# Altium PCB XILINX_JTAG_PCB.PcbDoc
Units mm, origin at the board's own origin, x right, y up, seen from the top; angles counter-clockwise.
Board outline 50 x 40 mm, 2 copper layers (L1 (Top), L2 (Bottom)); 26 components, 26 nets, 78 pads, 20 vias.
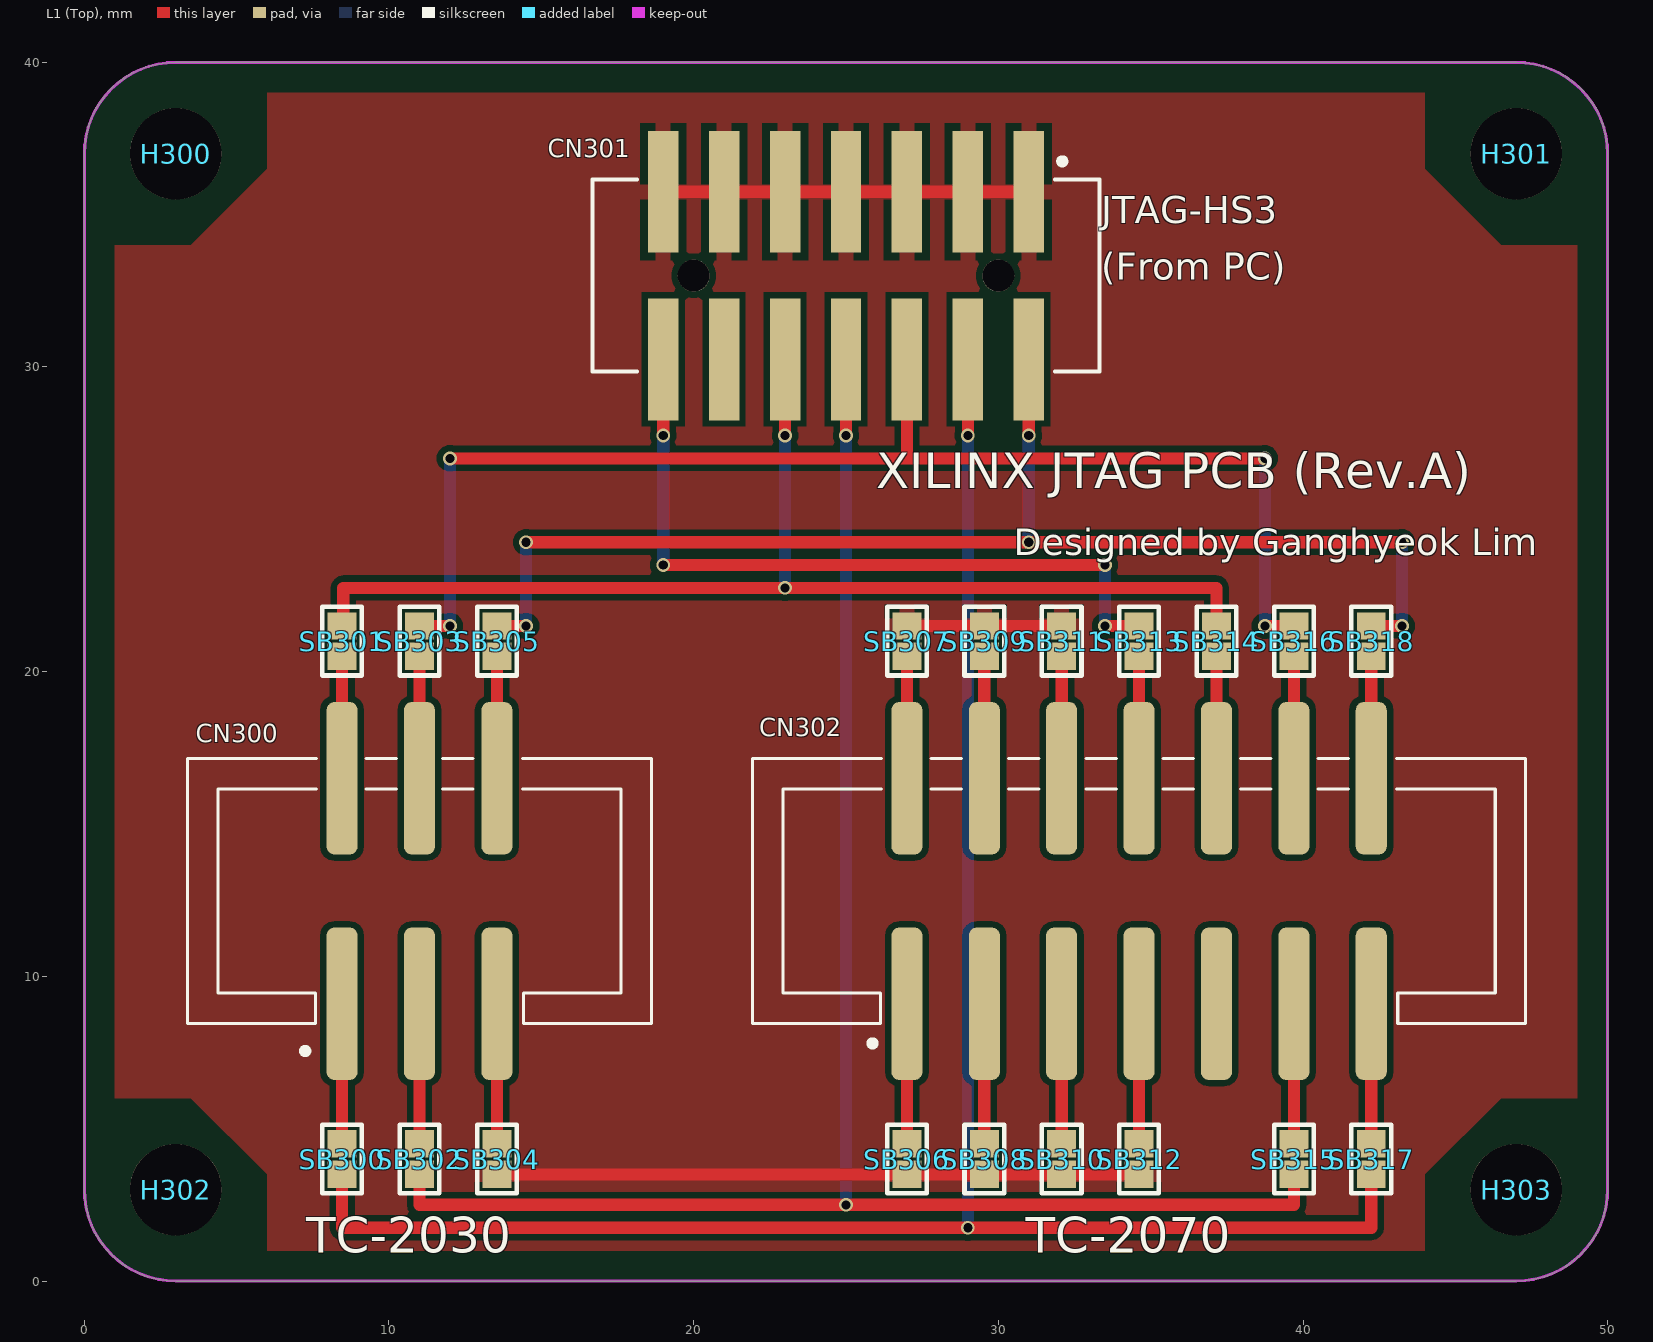
[diagram p0: L1 (Top) view]
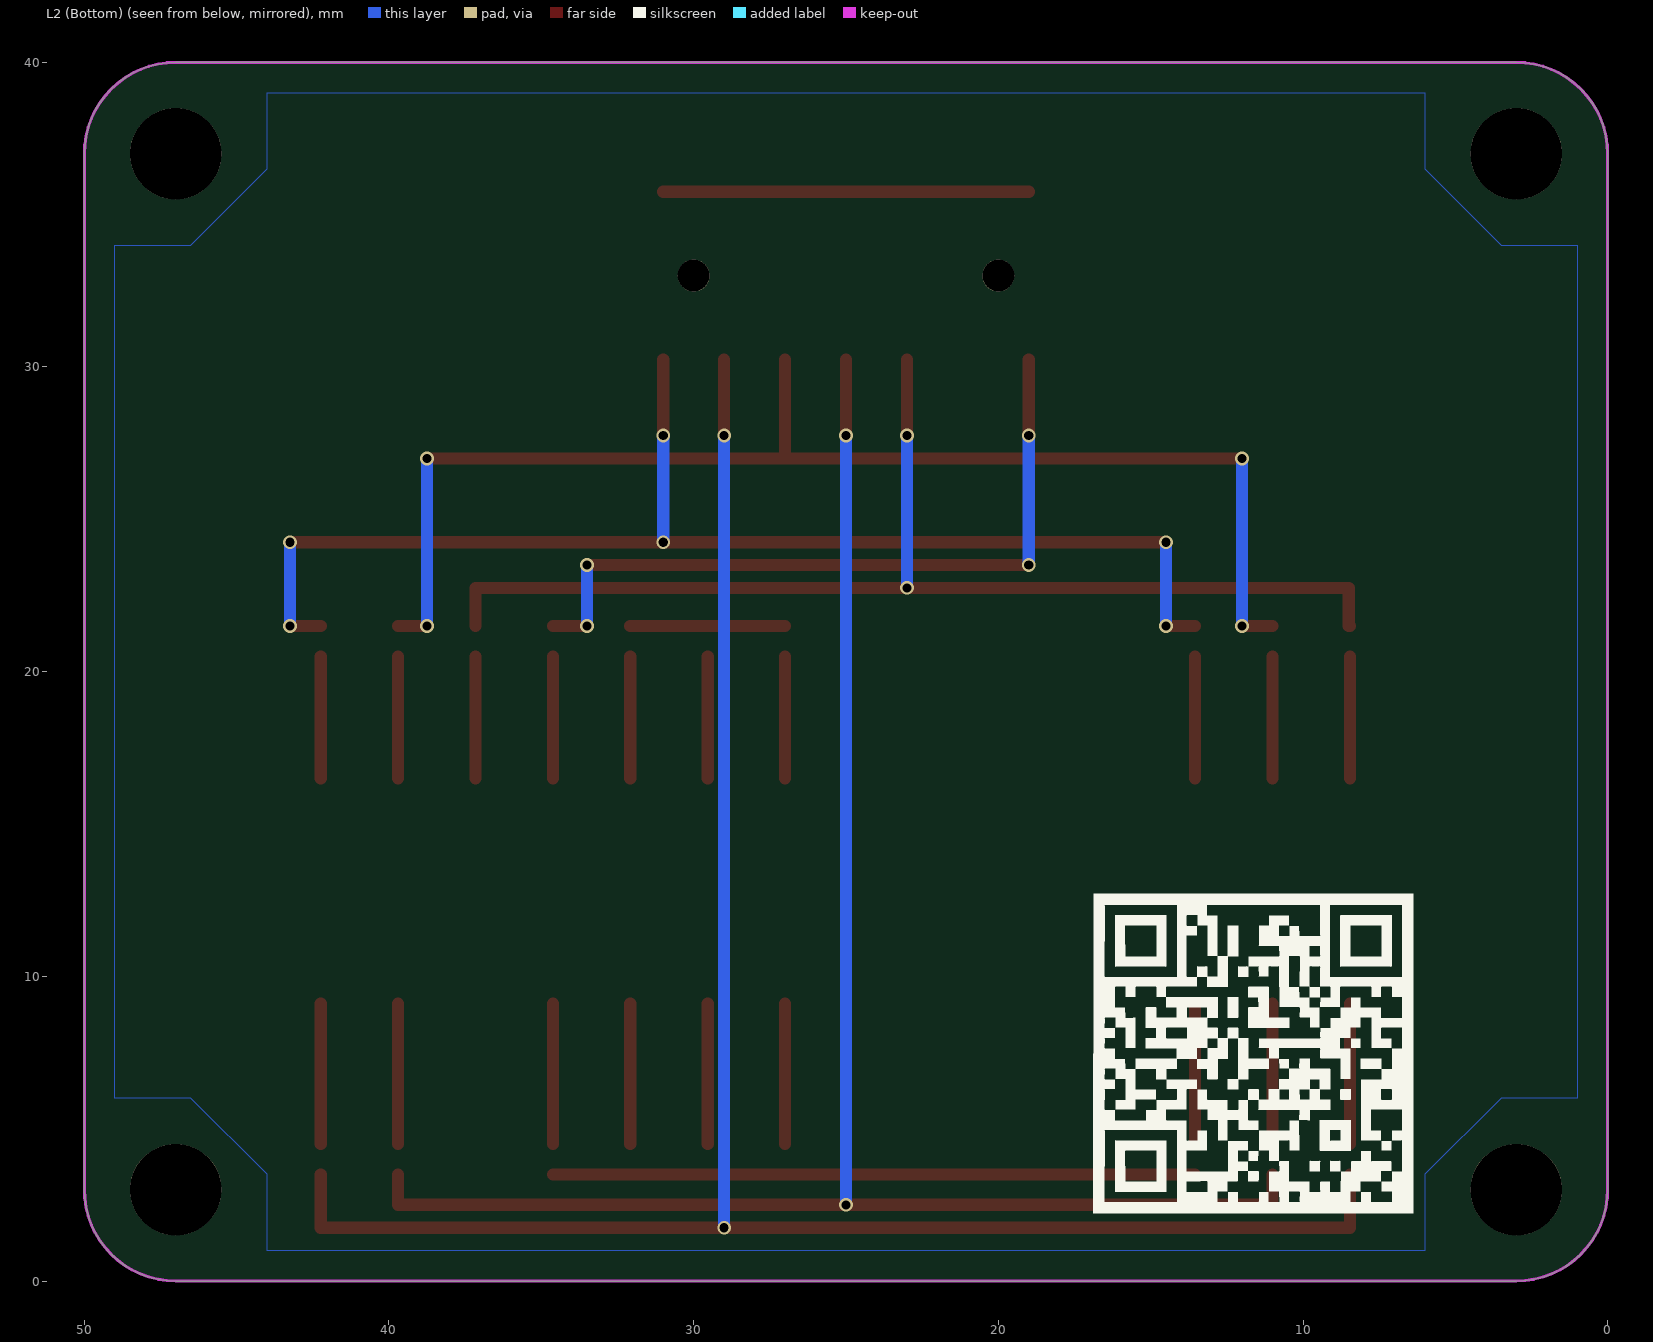
[diagram p1: L2 (Bottom) view, seen from below]

## Layer stack, top to bottom
Top Solder: solder mask 0.0102, Solder Resist, Dk 3.5
L1 (Top): signal copper 0.0356
Dielectric 1: dielectric 0.32, FR-4, Dk 4.8
L2 (Bottom): signal copper 0.0356
Bottom Solder: solder mask 0.0102, Solder Resist, Dk 3.5

## Board outline
3,0 cw(c3,3) 0,3 0,37 cw(c3,37) 3,40 47,40 cw(c47,37) 50,37 50,3 cw(c47,3) 47,0

## Design rules (kind name [scope] priority, off if disabled: settings)
BoardOutlineClearance [All] p1: gap=0.2 ignorepadtopadclearanceinfootprint=FALSE except(0.4: Arc-SplitBarrior Arc-SplitContinuation Track-SplitBarrior Track-SplitContinuation SMDPad-SplitBarrior SMDPad-SplitContinuation THPad-SplitBarrior THPad-SplitContinuation Via-SplitBarrior Via-SplitContinuation Fill-SplitBarrior Fill-SplitContinuation Poly-SplitBarrior Poly-SplitContinuation Region-SplitBarrior Region-SplitContinuation Text-SplitBarrior Text-SplitContinuation)
Clearance "Clearance Bottom Layer" [OnLayer('Bottom Layer')] p1: gap=0.203 ignorepadtopadclearanceinfootprint=TRUE except(0.254: Arc-Text Track-Text SMDPad-Text THPad-Text Via-Text Fill-Text Poly-Text Region-Text Text-Text)
Clearance "Clearance Top Layer" [OnLayer('Top Layer')] p2: gap=0.203 ignorepadtopadclearanceinfootprint=TRUE except(0.254: Arc-Text Track-Text SMDPad-Text THPad-Text Via-Text Fill-Text Poly-Text Region-Text Text-Text)
Clearance [All] p3: gap=0.2 ignorepadtopadclearanceinfootprint=FALSE except(0.089: Arc-Arc Arc-Track Arc-SMDPad Track-Track Track-SMDPad SMDPad-SMDPad; 0.127: Arc-Via Track-Via SMDPad-Via THPad-Via Via-Via; 0.254: Arc-Text Track-Text SMDPad-Text THPad-Text Via-Text Fill-Text Poly-Text Region-Text Text-Text)
HoleSize [All] p1: absolutevalues=TRUE maxlimit=6.3 minlimit=0.2 maxpercent=80.000 minpercent=20.000
MinimumAnnularRing [All] p1: minimumring=0.076
MinimumSolderMaskSliver [All] p1: minsoldermaskwidth=0.1
PolygonConnect PolygonConnect_1 [All] p1: thpad.connectstyle=Relief thpad.reliefconductorwidth=0.508 thpad.reliefentries=4 thpad.polygonreliefangle="90 Angle" thpad.airgapwidth=0.254 smdpad.connectstyle=Relief smdpad.reliefconductorwidth=0.508 smdpad.reliefentries=4 smdpad.polygonreliefangle="90 Angle" smdpad.airgapwidth=0.254 via.connectstyle=Direct via.reliefconductorwidth=0.508 via.reliefentries=4 via.polygonreliefangle="90 Angle" via.airgapwidth=0.254
RoutingCorners [All] p1: cornerstyle=Round minsetback=2.54 maxsetback=2.54
RoutingVias [All] p1: holewidth=0.3 width=0.45 viastyle="Through Hole" minholewidth=0.15 minwidth=0.3 maxholewidth=1 maxwidth=2
SilkToSilkClearance [All] p1: silktosilkclearance=0.1
SilkToSolderMaskClearance [IsPad] p1: minsilkscreentomaskgap=0.1 clearancetoexposedcopper=TRUE
SolderMaskExpansion [All] p1: expansion=0.102 istentingtop=FALSE
Width [All] p1: maxlimit=2 minlimit=0.1 preferedwidth=0.2
25 further rules are at their usual default settings.

## Components (designator, comment, footprint, x,y, rotation, side; value= is the part's Value field where it differs from the comment)
CN300 "3FB-06P-SMD" CON_BOX_HEADER_DUAL_2x3PIN(2.54MM) 11,12.8 r0 top
CN301 "0878321420" "CON_BOX_HEADER_DUAL_2x7PIN(2.00MM) (0878321420)" 25,33 r180 top
CN302 "3020-14-0300-00" "CON_BOX_HEADER_DUAL_2x7PIN(2.54MM) (3020-14-0300-00)" 34.62,12.8 r0 top
H300 "NTH-3MM" HOLE_NTH-3.0MM 3,37 r90 top
H301 "NTH-3MM" HOLE_NTH-3.0MM 47,37 r0 top
H302 "NTH-3MM" HOLE_NTH-3.0MM 3,3 r90 top
H303 "NTH-3MM" HOLE_NTH-3.0MM 47,3 r90 top
SB300 "SB" "SB_Solder-Bridge (Narrow)" 8.46,4 r90 top
SB301 "SB" "SB_Solder-Bridge (Narrow)" 8.46,21 r90 top
SB302 "SB" "SB_Solder-Bridge (Narrow)" 11,4 r90 top
SB303 "SB" "SB_Solder-Bridge (Narrow)" 11,21 r90 top
SB304 "SB" "SB_Solder-Bridge (Narrow)" 13.54,4 r90 top
SB305 "SB" "SB_Solder-Bridge (Narrow)" 13.54,21 r90 top
SB306 "SB" "SB_Solder-Bridge (Narrow)" 27,4 r90 top
SB307 "SB" "SB_Solder-Bridge (Narrow)" 27,21 r90 top
SB308 "SB" "SB_Solder-Bridge (Narrow)" 29.54,4 r90 top
SB309 "SB" "SB_Solder-Bridge (Narrow)" 29.54,21 r90 top
SB310 "SB" "SB_Solder-Bridge (Narrow)" 32.08,4 r90 top
SB311 "SB" "SB_Solder-Bridge (Narrow)" 32.08,21 r90 top
SB312 "SB" "SB_Solder-Bridge (Narrow)" 34.62,4 r90 top
SB313 "SB" "SB_Solder-Bridge (Narrow)" 34.62,21 r90 top
SB314 "SB" "SB_Solder-Bridge (Narrow)" 37.16,21 r90 top
SB315 "SB" "SB_Solder-Bridge (Narrow)" 39.7,4 r90 top
SB316 "SB" "SB_Solder-Bridge (Narrow)" 39.7,21 r90 top
SB317 "SB" "SB_Solder-Bridge (Narrow)" 42.24,4 r90 top
SB318 "SB" "SB_Solder-Bridge (Narrow)" 42.24,21 r90 top

## Footprints (in the part's own frame and the unit in brackets; to place one, negate y for a bottom-side part, rotate by r counter-clockwise, add the part's x,y. Pads: shape width x height; smd on the part's side, far side on the other; paste and mask are expansions set on the pad)
CON_BOX_HEADER_DUAL_2x3PIN(2.54MM) [mm]
  rrect50% 1.02x5 smd mask+0: 1(-2.54,-3.7) 2(-2.54,3.7) 3(0,-3.7) 4(0,3.7) 5(2.54,-3.7) 6(2.54,3.7)
  silkscreen extent -7.61,-5.3 7.61,4.35, body extent -7.62,-4.75 7.62,4.75, height 10.52
"CON_BOX_HEADER_DUAL_2x7PIN(2.00MM) (0878321420)" [mm] "Molex 0878321420"
  rect 1x4 smd: 1(-6,-2.75) 2(-6,2.75) 3(-4,-2.75) 4(-4,2.75) 5(-2,-2.75) 6(-2,2.75) 7(0,-2.75) 8(0,2.75) 9(2,-2.75) 10(2,2.75) 11(4,-2.75) 12(4,2.75) 13(6,-2.75) 14(6,2.75)
  round 1.05 hole 1.05 unplated: ""(-5,0) ""(5,0)
  silkscreen extent -8.32,-3.85 8.32,3.15, body extent -8.33,-3.15 8.33,3.15, height 7.61
"CON_BOX_HEADER_DUAL_2x7PIN(2.54MM) (3020-14-0300-00)" [mm] "3020-14-0300-00-TR"
  rrect50% 1.02x5 smd mask+0: 1(-7.62,-3.7) 2(-7.62,3.7) 3(-5.08,-3.7) 4(-5.08,3.7) 5(-2.54,-3.7) 6(-2.54,3.7) 7(0,-3.7) 8(0,3.7) 9(2.54,-3.7) 10(2.54,3.7) 11(5.08,-3.7) 12(5.08,3.7) 13(7.62,-3.7) 14(7.62,3.7)
  silkscreen extent -12.69,-5.05 12.69,4.35, body extent -12.7,-5.59 12.7,5.59, height 11.44
HOLE_NTH-3.0MM [mm]
  round 3 hole 3: 1(0,0)
"SB_Solder-Bridge (Narrow)" [mm] "SB (Solder-Bridge)"
  rect 0.9x0.95 smd mask+0.038: 1(-0.5,0) 2(0.5,0)
  silkscreen extent -1.12,-0.65 1.12,0.65

## Part data
CN300: library part CON_BOX_HEADER_DUAL_2x3PIN(2.54MM), "BOX HEADER 2x3 Pin SMD / 2.54mm pitch / with IDC Connector"
CN301: library part CON_BOX_HEADER_DUAL_2x7PIN(2.00MM), "CONN HEADER SMD 14POS 2MM"
CN302: library part CON_BOX_HEADER_DUAL_2x7PIN(2.54MM), "BOX HEADER 2x7 Pin SMD / 2.54mm pitch / with IDC Connector"
H300 H301 H302 H303: library part HOLE_NTH-3.0MM, "Non-Through Hole 3mm"
SB300 SB301 SB302 SB303 SB304 SB305 SB306 SB307 SB308 SB309 SB310 SB311 SB312 SB313 SB314 SB315 SB316 SB317 SB318: library part "SB_Solder-Bridge (Narrow)", "SB_Solder-Bridge"

## Via types
v1: diameter 0.45, hole 0.3, L1 (Top) to L2 (Bottom), tented both sides, 20 vias

## Nets (pads, with @x,y where several pads share a name; then routed paths per layer and width w, separated by ;. In a path a pad name is that pad's centre, name@x,y a point inside that pad or via, vN(x,y) a via of type N, cw(c..) or ccw(c..) an arc to the next point about the centre after c; other vN are vias at no path point)
DGND: CN301.1 CN301.3 CN301.5 CN301.7 CN301.9 CN301.11 CN301.13 SB304.1 SB306.1 SB307.2 SB308.1 SB309.2 SB310.1 SB311.2 SB312.1 | length 38.2
  L1 (Top) w0.4: SB304.1 SB306.1 SB308.1 SB310.1 SB312.1 ; CN301.13 CN301.11 CN301.9 CN301.7 CN301.5 CN301.3 CN301.1 ; SB307.2 SB309.2 SB311.2
JTAG_TCK: CN301.6 SB303.2 SB316.2 | length 43
  L1 (Top) w0.4: SB303.2 v1(12,21.5) ; v1(12,27) 27,27 ; CN301.6 27,27 ; v1(38.75,21.5) SB316.2 ; v1(38.75,27) 27,27
  L2 (Bottom) w0.4: v1(12,21.5) v1(12,27) ; v1(38.75,21.5) v1(38.75,27)
JTAG_TDI: CN301.10 SB301.2 SB314.2 | length 38.7
  L1 (Top) w0.4: SB301.2 8.5,21.5 8.5,22.75 v1(23,22.75) 37.16,22.75 SB314.2 ; v1(23,27.75) CN301.10
  L2 (Bottom) w0.4: v1(23,22.75) v1(23,27.75)
JTAG_TDO: CN301.8 SB302.1 SB315.1 | length 58.5
  L1 (Top) w0.4: SB302.1 11,2.5 v1(25,2.5) 39.7,2.5 SB315.1 ; v1(25,27.75) CN301.8
  L2 (Bottom) w0.4: v1(25,2.5) v1(25,27.75)
JTAG_TMS: CN301.4 SB300.1 SB317.1 | length 65.8
  L1 (Top) w0.4: SB300.1 8.46,1.75 v1(29,1.75) 42.24,1.75 ; v1(29,27.75) CN301.4 ; SB317.1 42.24,1.75 ; 42.25,1.75 42.24,1.75
  L2 (Bottom) w0.4: v1(29,1.75) v1(29,27.75)
NetCN300_1: CN300.1 SB300.2 | length 4.9
  L1 (Top) w0.4: SB300.2@8.46,4.75 SB300.2 CN300.1
NetCN300_2: CN300.2 SB301.1 | length 4.3
  L1 (Top) w0.4: CN300.2 SB301.1 SB301.1@8.46,20.25
NetCN300_3: CN300.3 SB302.2 | length 4.9
  L1 (Top) w0.4: SB302.2@11,4.75 SB302.2 CN300.3
NetCN300_4: CN300.4 SB303.1 | length 4.3
  L1 (Top) w0.4: CN300.4 SB303.1 SB303.1@11,20.25
NetCN300_5: CN300.5 SB304.2 | length 4.9
  L1 (Top) w0.4: SB304.2@13.54,4.75 SB304.2 CN300.5
NetCN300_6: CN300.6 SB305.1 | length 4.3
  L1 (Top) w0.4: CN300.6 SB305.1 SB305.1@13.54,20.25
NetCN302_1: CN302.1 SB306.2 | length 4.6
  L1 (Top) w0.4: SB306.2 27,4.75 CN302.1
NetCN302_2: CN302.2 SB307.1 | length 4
  L1 (Top) w0.4: CN302.2 27,20.25 SB307.1
NetCN302_3: CN302.3 SB308.2 | length 4.6
  L1 (Top) w0.4: SB308.2 29.54,4.75 CN302.3
NetCN302_4: CN302.4 SB309.1 | length 4
  L1 (Top) w0.4: CN302.4 29.54,20.25 SB309.1
NetCN302_5: CN302.5 SB310.2 | length 4.6
  L1 (Top) w0.4: SB310.2 32.08,4.75 CN302.5
NetCN302_6: CN302.6 SB311.1 | length 4
  L1 (Top) w0.4: CN302.6 32.08,20.25 SB311.1
NetCN302_7: CN302.7 SB312.2 | length 4.6
  L1 (Top) w0.4: SB312.2 34.62,4.75 CN302.7
NetCN302_8: CN302.8 SB313.1 | length 4
  L1 (Top) w0.4: CN302.8 34.62,20.25 SB313.1
NetCN302_10: CN302.10 SB314.1 | length 4
  L1 (Top) w0.4: CN302.10 37.16,20.25 SB314.1
NetCN302_11: CN302.11 SB315.2 | length 4.6
  L1 (Top) w0.4: SB315.2 39.7,4.75 CN302.11
NetCN302_12: CN302.12 SB316.1 | length 4
  L1 (Top) w0.4: CN302.12 39.7,20.25 SB316.1
NetCN302_13: CN302.13 SB317.2 | length 4.6
  L1 (Top) w0.4: SB317.2 42.24,4.75 CN302.13
NetCN302_14: CN302.14 SB318.1 | length 4
  L1 (Top) w0.4: CN302.14 42.24,20.25 SB318.1
P3.3VS: CN301.2 SB305.2 SB318.2 | length 42.2
  L1 (Top) w0.4: SB305.2 v1(14.5,21.5) ; v1(14.5,24.25) v1(31,24.25) v1(43.25,24.25) ; v1(31,27.75) CN301.2 ; SB318.2 v1(43.25,21.5)
  L2 (Bottom) w0.4: v1(14.5,21.5) v1(14.5,24.25) ; v1(31,24.25) v1(31,27.75) ; v1(43.25,21.5) v1(43.25,24.25)
PS_NRST: CN301.14 SB313.2 | length 24.4
  L1 (Top) w0.4: v1(19,23.5) v1(33.5,23.5) ; v1(19,27.75) CN301.14 ; v1(33.5,21.5) SB313.2
  L2 (Bottom) w0.4: v1(19,23.5) v1(19,27.75) ; v1(33.5,21.5) v1(33.5,23.5)
pads on no net: CN301. CN301.12 CN302.9 H300.1 H301.1 H302.1 H303.1

## Polygon pours and split planes (outlines as drawn)
DGND on L1 (Top) "DGND_L1 (Top)" (solid, remove dead copper, pour order 0): 3.5,6 6,3.5 6,1 44,1 44,3.5 46.5,6 49,6 49,34 46.5,34 44,36.5 44,39 6,39 6,36.5 3.5,34 1,34 1,6
DGND on L2 (Bottom) "DGND_L2 (Bottom)" (solid, remove dead copper, pour order 1): 3.5,6 6,3.5 6,1 44,1 44,3.5 46.5,6 49,6 49,34 46.5,34 44,36.5 44,39 6,39 6,36.5 3.5,34 1,34 1,6

## Keep-outs
Keep-Out Layer:
  the board outline again, w0.1

## Silkscreen, mask and mechanical layers (free items; w line width, h text height)
Top Overlay:
  text "JTAG-HS3" at 33.373,34.425 h1.52
  text "(From PC)" at 33.373,32.561 h1.52
  text "XILINX JTAG PCB (Rev.A)" at 26,25.626 h2
  text "Designed by Ganghyeok Lim" at 30.5,23.533 h1.5
  text "TC-2030" at 7.287,0.538 h2
  text "TC-2070" at 30.907,0.538 h2
Bottom Overlay:
  drawing of 22 lines, arcs and shapes, not listed
Mechanical 13:
  lines w0.1: -21.5,34 -2,34 ; -21.5,37 -2,37 ; -18,31 -18,37 ; 56.873,36.027 76.373,36.027 ; 56.873,39.027 76.373,39.027 ; 57,3.033 106.25,3.033 ; 57,6.027 106.25,6.027 ; 57,9.033 106.25,9.033 ; 57,12.027 106.25,12.027 ; 57,15.027 106.25,15.027 ; 57,18.027 106.25,18.027 ; 57,21.027 106.25,21.027 ; 57,24 106.25,24 ; 57,27.033 106.25,27.033 ; 57,30.027 106.25,30.027 ; 57,33.027 106.25,33.027 ; 57,36.027 106.25,36.027 ; 57,39.027 106.25,39.027 ; 57,42 76.5,42 ; 57,42.027 106.25,42 ; 57,45.027 106.25,45.027 ; 57,48.033 106.25,48.033 ; 57,51.027 106.25,51.027 ; 57,54.027 106.25,54.027 ; 57,57.027 106.25,57.027 ; 57,60.027 106.25,60.027 ; 57,63 106.25,63 ; 57,66 106.25,66 ; 57,69 80.5,69 ; 60.5,0 60.5,69 ; 80.5,0 80.5,69 ; 106.25,69 80.5,69
  lines w0.254: -21.5,31 -2,31 -2,40 -21.5,40 -21.5,31 ; 57,0 106.25,0 106.25,72 57,72 57,0
  text "# PCB Specification (JLCPCB)" at 58,69.876 h2
  text "Category" at 67.611,67.143 h1.52
  text "No" at 58,67.016 h1.52
  text "Selection" at 90.351,67.009 h1.52
  text "Base Material" at 61.611,64.01 h1.52
  text "1" at 58.593,64 h1.52
  text "FR-4" at 81.75,64 h1.52
  text "Layer #" at 61.611,61.137 h1.52
  text "2 - Layer" at 81.75,61.143 h1.52
  text "2" at 58.479,61 h1.52
  text "50.00(mm) * 40.00(mm)" at 81.75,58.146 h1.52
  text "3" at 58.483,58.018 h1.52
  text "Dimension" at 61.611,58.018 h1.52
  text "1.6T" at 81.75,55.018 h1.52
  text "4" at 58.457,55 h1.52
  text "Thickness" at 61.611,55.01 h1.52
  text "5" at 58.479,52.018 h1.52
  text "Color" at 61.611,52.003 h1.52
  text "Black" at 81.75,52.002 h1.52
  text "Material Type" at 61.611,49.154 h1.52
  text "6" at 58.481,49.018 h1.52
  text "Default" at 81.75,49.01 h1.52
  text "HASL(with Lead)" at 81.75,46.263 h1.52
  text "7" at 58.487,46 h1.52
  text "Surface Finish" at 61.611,45.995 h1.52
  text "8" at 58.486,43.018 h1.52
  text "Gold Thickness" at 61.611,43.012 h1.52
  text "No" at 81.75,43.016 h1.52
  text "Outer Copper Weight" at 61.611,40.146 h1.52
  text "9" at 58.481,40.018 h1.52
  text "1 oz" at 81.75,40.017 h1.52
  text "# Layer Information" at -20.5,37.876 h2
  text "Inner Copper Weight" at 61.611,37.146 h1.52
  text "10" at 58.137,37.018 h1.52
  text "0.5 oz" at 81.75,37.018 h1.52
  text "Top (Signal / GND)" at -17,35.137 h1.52
  text "L1" at -20.4,35 h1.52
  text "Impedance Control" at 61.611,34.128 h1.52
  text "No" at 81.75,34.01 h1.52
  text "11" at 58.214,34 h1.52
  text "Bottom (Signal /GND)" at -17,32.271 h1.52
  text "L2" at -20.4,32 h1.52
  text "Layer Stack-up" at 61.611,31.137 h1.52
  text "Default Stack-up" at 81.75,31.119 h1.52
  text "12" at 58.138,31 h1.52
  text "Via Covering" at 61.611,28.146 h1.52
  text "13" at 58.132,28.018 h1.52
  text "Tented" at 81.75,27.875 h1.52
  text "14" at 58.119,25 h1.52
  text "Min. Via Hole Size / Diameter" at 61.611,25.003 h1.52
  text "Hole : 0.3mm   /   Diameter : 0.45mm" at 81.75,25.003 h1.52
  text "±0.2mm (Regular)" at 81.75,22.146 h1.52
  text "15" at 58.124,22.018 h1.52
  text "Board Outline Tolerance" at 61.611,22.012 h1.52
  text "16" at 58.127,19.018 h1.52
  text "Confirm Production File" at 61.611,19.011 h1.52
  text "No" at 81.75,19.018 h1.52
  text "17" at 58.133,16 h1.52
  text "Remove Order Number" at 61.611,16.003 h1.52
  text "Yes" at 81.749,16.01 h1.52
  text "Flying Probe Test" at 61.611,13.154 h1.52
  text "Fully Test" at 81.75,13.154 h1.52
  text "18" at 58.134,13.018 h1.52
  text "Gold Fingers" at 61.611,10.146 h1.52
  text "19" at 58.135,10.018 h1.52
  text "No" at 81.75,10.018 h1.52
  text "30° Finger Chamfered" at 61.611,7.146 h1.52
  text "20" at 58.1,7.018 h1.52
  text "No" at 81.75,7.018 h1.52
  text "21" at 58.177,4 h1.52
  text "Castellated Holes" at 61.611,4.002 h1.52
  text "No" at 81.75,4.01 h1.52
  text "Edge Plating" at 61.611,1.145 h1.52
  text "22" at 58.101,1 h1.52
  text "No" at 81.75,1.01 h1.52

## Dimensions
50,0 to 50,40 on Mechanical 13
0,0 to 50,0 on Mechanical 13